# Altium PCB PCB2.PcbDoc
Units mm, origin at the board's own origin, x right, y up, seen from the top; angles counter-clockwise.
Board outline 90 x 71 mm, 2 copper layers (Top Layer, Bottom Layer); 35 components, 38 nets, 145 pads, 20 vias.
Unrouted connection lines stored in the file: 5.
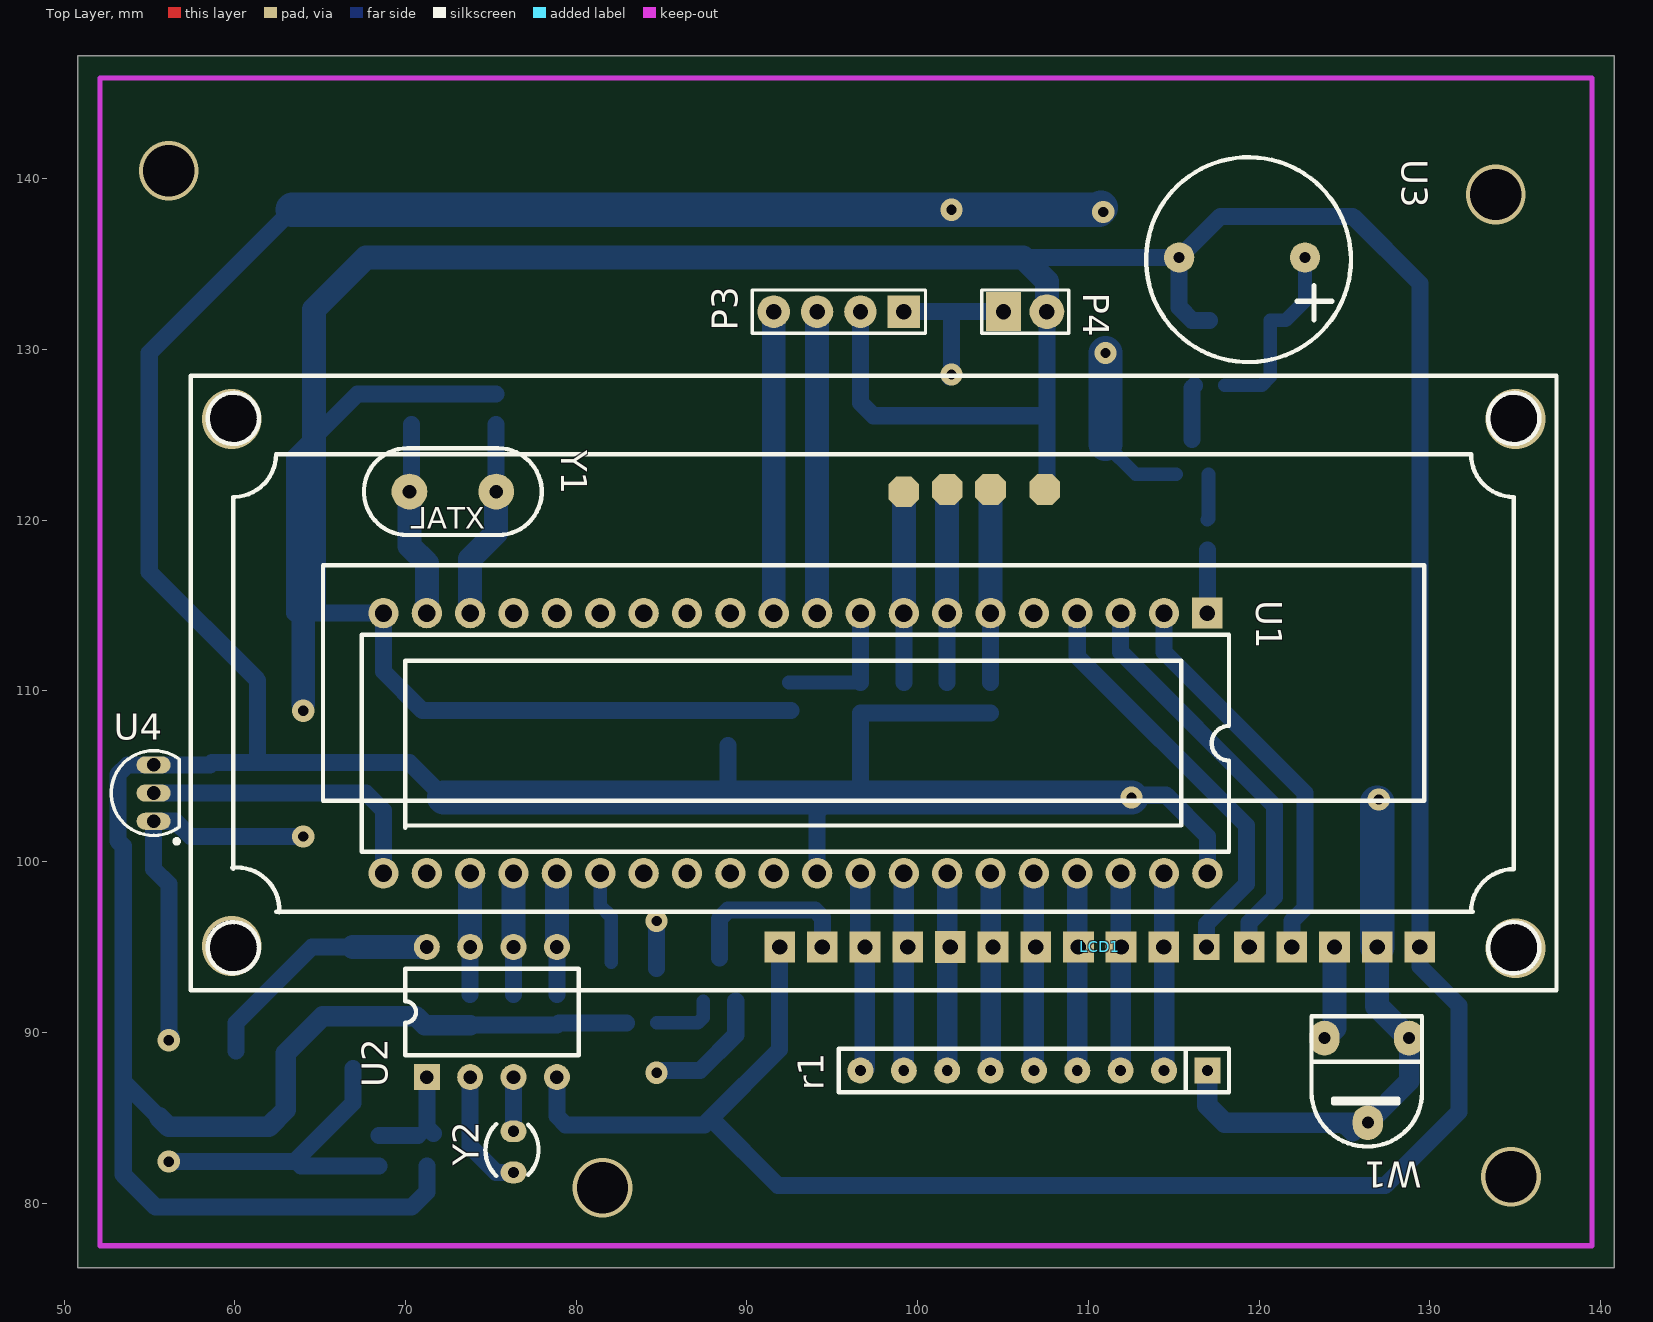
[diagram p0: Top Layer view]
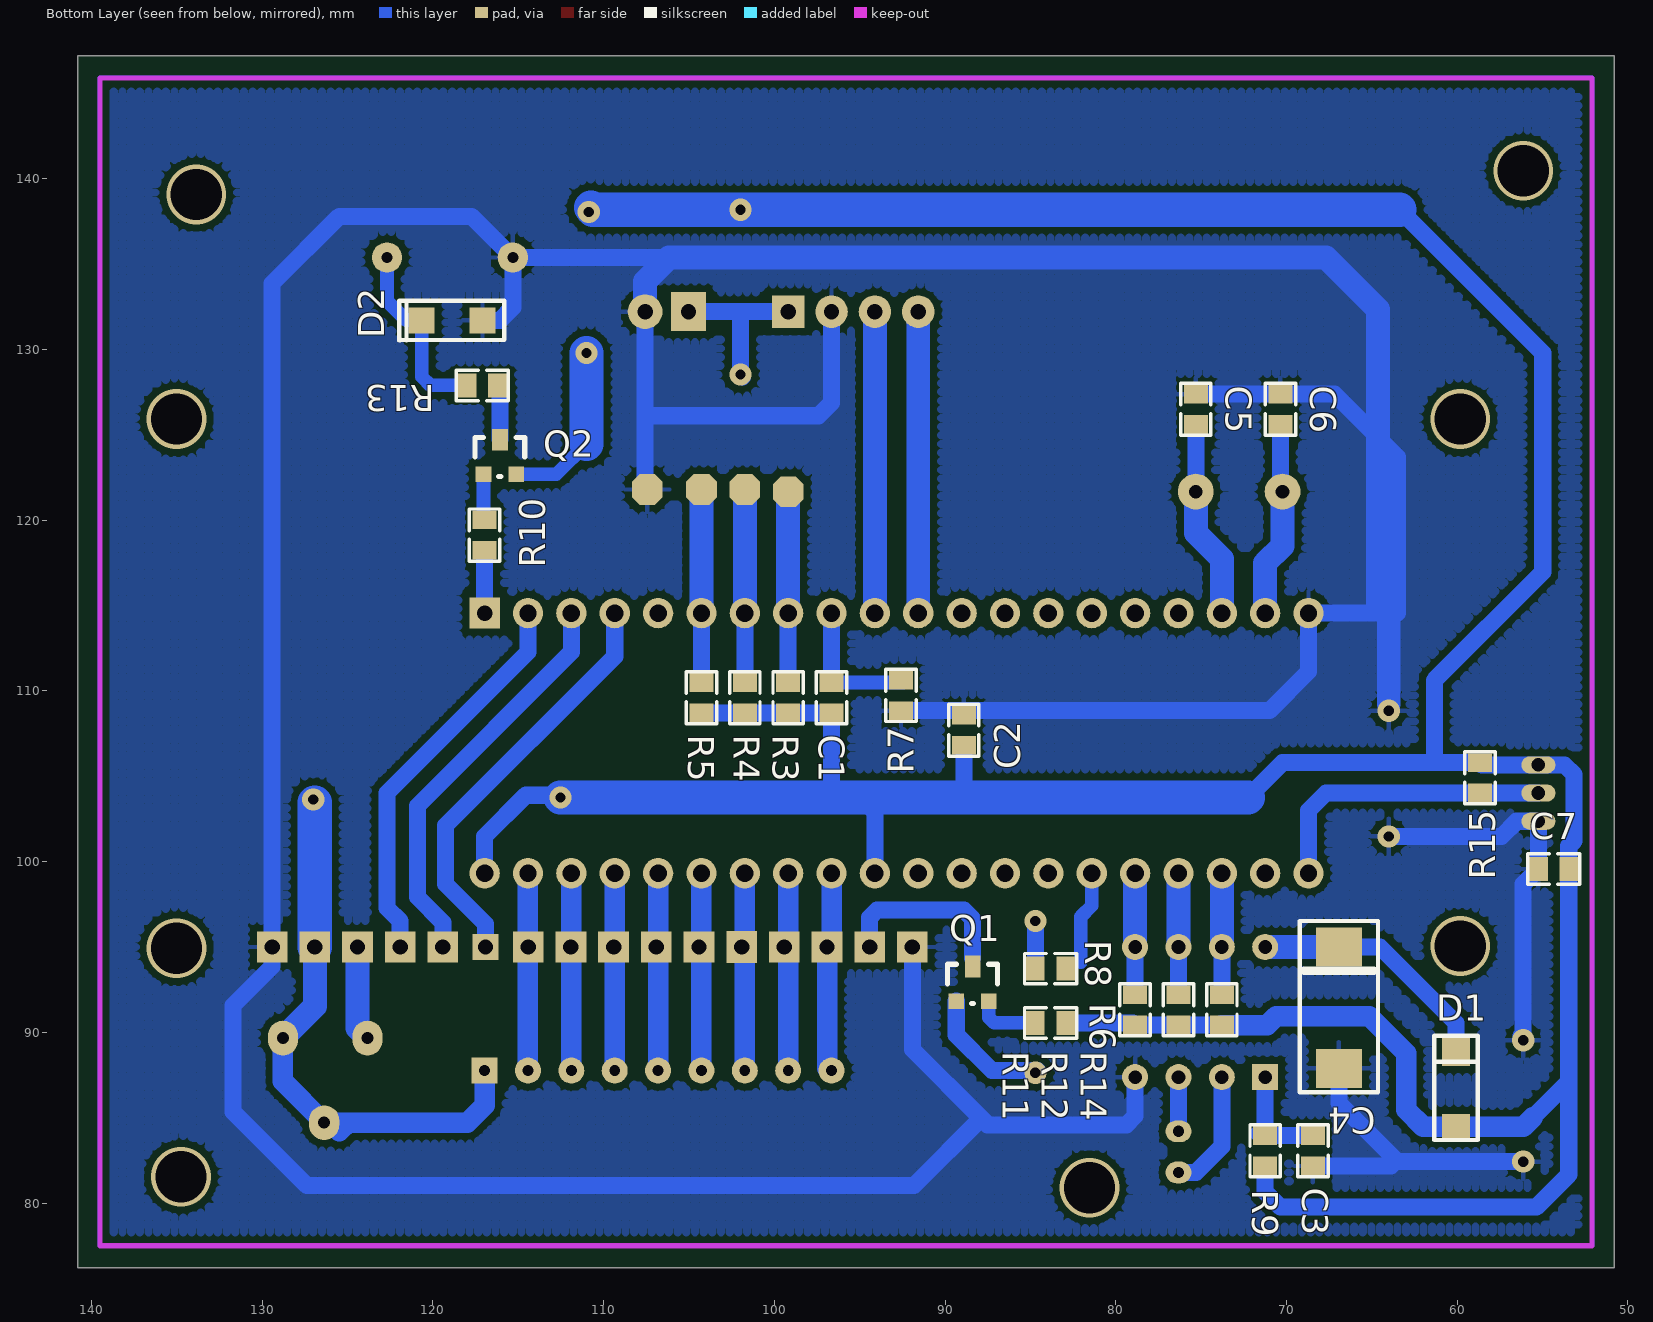
[diagram p1: Bottom Layer view, seen from below]

## Layer stack, top to bottom
Top Layer: signal copper 0.0356
Dielectric: dielectric 0.32, FR-4, Dk 4.8
Bottom Layer: signal copper 0.0356

## Board outline
50.8,76.2 140.8,76.2 140.8,147.2 50.8,147.2

## Design rules (kind name [scope] priority, off if disabled: settings)
Clearance [All] p1: gap=0.4
PolygonConnect [All] p1: connectstyle=Relief reliefconductorwidth=0.254 reliefentries=4 polygonreliefangle="90 Angle"
RoutingVias [All] p1: holewidth=0.7 width=1.2 viastyle="Through Hole" minholewidth=0.711 minwidth=1.27 maxholewidth=0.711 maxwidth=1.27
SilkscreenOverComponentPads [All] p1: minsilkscreentomaskgap=0.254
SolderMaskExpansion [All] p1: expansion=0.102
Width [All] p1: maxlimit=3 minlimit=0.5 preferedwidth=1
27 further rules are at their usual default settings.

## Components (designator, comment, footprint, x,y, rotation, side; value= is the part's Value field where it differs from the comment)
C1 "104" 0805C 96.647,110.49 r270 bottom
C2 "104" 0805C 88.9,106.807 r90 bottom
C3 "104" 0805C 68.453,83.947 r270 bottom
C4 "CE" 2817C+ 66.929,94.996 r270 bottom
C5 "20" 0805C 75.311,127.381 r270 bottom
C6 "20" 0805C 70.358,127.381 r270 bottom
C7 "104" 0805C 55.245,99.568 r180 bottom
D1 "DIODE" SS14-4007 60.071,84.455 r90 bottom
D2 "D IN4148" 4148YZ 117.094,131.699 r0 bottom
LCD1 "1602" LCD1602 129.413,94.996 r180 top
P3 "CON4" SIP4 99.187,132.207 r180 top
P4 "CON2" SIP2 105.029,132.207 r0 top
Q1 "2SC8550" SOT23 88.392,92.837 r180 bottom
Q2 "2SC8550" SOT23 116.078,123.698 r180 bottom
r1 "10K" RPZ9 116.967,87.757 r180 top
R3 "10K" 0805R 99.187,110.49 r270 bottom
R4 "10K" 0805R 101.727,110.49 r270 bottom
R5 "10K" 0805R 104.267,110.49 r270 bottom
R6 "1k" 0805R 82.931,90.551 r0 bottom
R7 "4.7K" 0805R 92.583,108.839 r90 bottom
R8 "1k" 0805R 82.931,93.726 r0 bottom
R9 "100" 0805R 71.247,83.947 r270 bottom
R10 "1K" 0805R 116.967,118.237 r90 bottom
R11 "RES" 0805R 78.867,92.202 r270 bottom
R12 "RES" 0805R 76.327,92.202 r270 bottom
R13 "100" 0805R 116.205,127.889 r0 bottom
R14 "RES" 0805R 73.787,92.202 r270 bottom
R15 "4.7K" 0805R 58.674,104.013 r90 bottom
U1 "STC89C52" DIP40 116.967,114.554 r270 top
U2 "DS1302" DIP8 71.247,87.376 r90 top
U3 "buzzer" BUZZER 122.682,135.382 r0 top
U4 "18B20" 18B20 55.245,102.362 r0 top
W1 "200" RV 128.778,89.662 r180 top
Y1 "12M" XTAL 70.231,121.666 r0 top
Y2 "XTAL" XTAL1-X 76.327,84.201 r90 top

## Footprints (in the part's own frame and the unit in brackets; to place one, negate y for a bottom-side part, rotate by r counter-clockwise, add the part's x,y. Pads: shape width x height; smd on the part's side, far side on the other; paste and mask are expansions set on the pad)
18B20 [mm]
  oval 2x1 hole 0.8: 1(0,0) 2(0,1.651) 3(0,3.302)
  silkscreen extent -2.48,-1.3 1.5,4.14, body extent -2.26,-0.82 2.01,4.38, height 10.08
0805C [mm]
  rect 1.1x1.4 smd: 1(0,0) 2(1.778,0)
  silkscreen extent -0.64,-0.89 2.41,0.89, body extent -0.11,-0.62 1.89,0.63, height 0.78
0805R [mm]
  rect 1.1x1.4 smd: 1(0,0) 2(1.778,0)
  silkscreen extent -0.64,-0.89 2.41,0.89, body extent -0.11,-0.63 1.89,0.63, height 0.55
2817C+ [mil]
  rect 90x106.3 smd: 1(0,0) 2(280,0)
  silkscreen extent -60,-90 335,90, body extent 1,-84 289,85, height 111
4148YZ [mil]
  rect 60x60 smd: 1(0,0) 2(140,0)
  silkscreen extent -50,-45 192,46, body extent 6,-30 144,30, height 80
BUZZER [mil]
  round 70 hole 25.59: 1(0,0) 2(-290,0)
  silkscreen extent -366,-241 106,231, body extent -415,-241 193,231, height 390
DIP8 [mil]
  rect 60x60 hole 31.5: 1(0,0)
  round 60 hole 31.5: 2(0,-100) 3(0,-200) 4(0,-300) 5(300,-300) 6(300,-200) 7(300,-100) 8(300,0)
  silkscreen extent 50,-350 250,50, body extent 0,-365 306,61, height 227
DIP40 [mil]
  rect 70.87x70.87 hole 35.43: 1(0,0)
  round 70 hole 40: 2(0,-100) 3(0,-200) 4(0,-300) 5(0,-400) 6(0,-500) 7(0,-600) 8(0,-700) 9(0,-800) 10(0,-900) 11(0,-1000) 12(0,-1100) 13(0,-1200) 14(0,-1300) 15(0,-1400) 16(0,-1500) 17(0,-1600) 18(0,-1700) 19(0,-1800) 20(0,-1900) 21(600,-1900) 22(600,-1800) 23(600,-1700) 24(600,-1600) 25(600,-1500) 26(600,-1400) 27(600,-1300) 28(600,-1200) 29(600,-1100) 30(600,-1000) 31(600,-900) 32(600,-800) 33(600,-700) 34(600,-600) 35(600,-500) 36(600,-400) 37(600,-300) 38(600,-200) 39(600,-100) 40(600,0)
  silkscreen extent 50,-1950 550,50, body extent 6,-1982 615,82, height 244
LCD1602 [mm] "LCD"
  rect 1.8x1.8 hole 0.9: 1(0,0) 2(2.5,0) 3(5,0) 4(7.5,0) 5(10,0) 7(15,0) 8(17.5,0) 9(20,0) 10(22.5,0) 11(25,0) 13(30,0) 14(32.5,0) 15(35,0) 16(37.5,0)
  rect 1.524x1.524 hole 0.9: 6(12.5,0)
  rect 1.8x1.9 hole 0.9: 12(27.5,0)
  silkscreen extent -8,-33.46 72,2.54
RPZ9 [mil]
  rect 60x60 hole 25: 1(0,0)
  round 60 hole 25: 2(100,0) 3(200,0) 4(300,0) 5(400,0) 6(500,0) 7(600,0) 8(700,0) 9(800,0)
  silkscreen extent -50,-50 850,50, body extent -43,-29 843,20, height 249
RV [mil]
  oval 70x80 hole 28: 1(0,0) 3(195,0) W(95,195)
  silkscreen extent -30,-50 225,250, body extent -31,-53 225,225, height 329
SIP2 [mil] "Connector; Header; 2 Position"
  rect 80x90 hole 35.43: 1(0,0)
  round 80 hole 35.43: 2(100,0)
  silkscreen extent -50,-50 150,50, body extent -50,-50 150,50, height 298
SIP4 [mm] "Connector; Header; 4 Position"
  rect 1.905x1.905 hole 0.9: 1(0,0)
  round 1.905 hole 0.9: 2(2.54,0) 3(5.08,0) 4(7.62,0)
  silkscreen extent -1.27,-1.27 8.89,1.27, body extent -1.27,-1.27 8.89,1.27, height 7.58
SOT23 [mil]
  rect 36x36 smd: B(-37.5,-40) E(37.5,-40)
  rect 36x50 smd: C(0.5,40)
  silkscreen extent -58,-45 58,45, body extent -55,-51 59,59, height 47
SS14-4007 [mil] "Chip Inductor, Body 2.0x1.2mm, IPC High Density"
  rect 60x65 smd: 1(0,0)
  rect 70x65 smd: 2(175,0)
  silkscreen extent -30,-50 210,50, body extent -3,-54 181,50, height 89
XTAL [mm]
  round 2.1 hole 0.8: 1(0,0) 2(5.08,0)
  silkscreen extent -2.66,-2.54 7.74,2.54, body extent -3.05,-2.35 8.13,2.35, height 4.19
XTAL1-X [mil]
  oval 50x60 hole 25.59: 1(0,0) 2(-95,0)
  silkscreen extent -103,-58 17,65, body extent -66,-44 -20,2, height 160

## Part data
C1 C2 C3 C5 C6 C7: library part CAP
r1: library part RPZ9
R3 R4 R5 R6 R7 R8 R9 R10 R13 R15: library part RES
W1: library part RV, "Variable Resistor"
Y1: library part XTAL, "Crystal Oscillator"
Y2: "Crystal Oscillator"

## Free pads (board coordinates)
  oct 1.8x1.8 all layers, no hole: 3(99.187,121.666) 4(101.727,121.793) 5(104.267,121.793) 6(107.442,121.793)

## Via types
v1: diameter 1.3, hole 0.6, Top Layer to Bottom Layer, 12 vias
v2: diameter 3.5, hole 3, Top Layer to Bottom Layer, 8 vias

## Nets (pads, with @x,y where several pads share a name; then routed paths per layer and width w, separated by ;. In a path a pad name is that pad's centre, name@x,y a point inside that pad or via, vN(x,y) a via of type N, cw(c..) or ccw(c..) an arc to the next point about the centre after c; other vN are vias at no path point)
18B20: R15.1 U1.21 U4.2 | length 17.6
  Bottom Layer w1: U4.2 R15.1 67.691,104.013 68.707,102.997 U1.21
E: LCD1.6 U1.4 | length 24.6
  Bottom Layer w1: U1.4 109.347,112.014 119.253,102.108 119.253,98.679 116.913,96.339 LCD1.6
GND: C2.2 C3.2 C4.2 C5.1 C6.1 C7.1 D2.1 LCD1.1 LCD1.16 P3.2 P4.2 pad.6 R7.1 U1.20 U2.4 U3.2 U4.1 | length 345.2
  Bottom Layer w1: v1(56.134,82.423) 63.5,82.423 63.563,82.486 ; v1@56.261,89.789 56.134,89.916 56.134,98.679 C7.1 U4.1 56.515,102.362 57.404,101.473 v1(64.008,101.473) ; C4.2 66.929,85.852 63.563,82.486 ; C3.2 63.881,82.169 63.563,82.486 ; C5.1 C6.1 67.183,127.381 64.643,124.841 63.5,123.698 63.5,114.554 64.008,114.554 U1.20 68.707,111.125 70.993,108.839 R7.1 ; U2.4 78.867,85.09 79.375,84.582 87.503,84.582 87.884,84.963 ; LCD1.16 91.913,88.992 87.884,84.963 ; P3.2 96.647,126.873 97.409,126.111 107.569,126.111 ; 106.172,135.382 U3.2 ; pad.6 107.569,121.92 107.569,126.111 ; P4.2 107.569,126.111 ; D2.1 116.078,131.699 115.316,132.461 U3.2 ; 87.884,84.963 91.821,81.026 127.381,81.026 131.699,85.344 131.699,91.567 129.413,93.853 LCD1.1 129.413,133.858 125.476,137.795 117.729,137.795 U3.2
  Bottom Layer w1.4: v1@64.008,109.22 64.008,114.554 64.643,115.189 64.643,124.841 64.643,132.334 67.691,135.382 106.172,135.382 107.569,133.985 P4.2
  other v1: 56.134,89.535 64.008,108.839
LED: R8.1 U1.26 | length 5.5
  Bottom Layer w0.8: U1.26 81.407,97.409 82.042,96.774 82.042,94.107
NetC1_1: C1.1 R7.2 U1.9 | length 8.3
  Bottom Layer w0.8: R7.2@92.456,110.49 C1.1
  Bottom Layer w1: C1.1 U1.9
NetC3_1: C3.1 R9.1 U2.1 | length 5.7
  Bottom Layer w1: C3.1 R9.1@70.739,83.947 ; U2.1 71.247,84.455 R9.1@71.628,84.074
NetC4_1: C4.1 D1.2 U2.8 | length 14.7
  Bottom Layer w1: D1.2 60.071,90.551 61.595,92.075 64.516,94.996 C4.1
  Bottom Layer w1.4: C4.1 U2.8
NetC5_2: C5.2 U1.18 Y1.2 | length 11.7
  Bottom Layer w1: Y1.2 C5.2
  Bottom Layer w1.4: U1.18 73.787,117.729 75.311,119.253 Y1.2
NetC6_2: C6.2 U1.19 Y1.1 | length 11.5
  Bottom Layer w1: Y1.1 70.358,121.793 C6.2
  Bottom Layer w1.4: Y1.1 70.231,118.491 71.247,117.475 U1.19
NetD2_2: D2.2 R13.2 U3.1 | length 11.2
  Bottom Layer w0.8: R13.2 120.142,127.889 120.65,128.397 D2.2 121.539,131.699 122.682,132.842 U3.1
NetLCD1_3: LCD1.3 W1.3 | length 5.6
  Bottom Layer w1.4: W1.3 124.413,90.25 LCD1.3
NetLCD1_7: LCD1.7 r1.2 U1.39 | length 11.6
  Bottom Layer w1.2: U1.39 114.427,87.884 r1.2@114.554,87.757
NetLCD1_8: LCD1.8 r1.3 U1.38 | length 11.6
  Bottom Layer w1.2: U1.38 111.887,87.884 r1.3@112.014,87.757
NetLCD1_9: LCD1.9 r1.4 U1.37 | length 11.6
  Bottom Layer w1.2: U1.37 109.347,87.884 r1.4@109.474,87.757
NetLCD1_10: LCD1.10 r1.5 U1.36 | length 11.6
  Bottom Layer w1.2: U1.36 106.807,87.884 r1.5@106.934,87.757
NetLCD1_11: LCD1.11 r1.6 U1.35 | length 11.6
  Bottom Layer w1.2: U1.35 104.267,87.884 r1.6@104.394,87.757
NetLCD1_12: LCD1.12 r1.7 U1.34 | length 11.6
  Bottom Layer w1.2: U1.34 101.727,87.884 r1.7@101.854,87.757
NetLCD1_13: LCD1.13 r1.8 U1.33 | length 11.6
  Bottom Layer w1.2: U1.33 99.187,87.884 r1.8@99.314,87.757
NetLCD1_14: LCD1.14 r1.9 U1.32 | length 11.7
  Bottom Layer w1.2: U1.32 96.647,95.194 96.904,94.937 96.904,87.887 r1.9@96.774,87.757
NetLCD1_15: LCD1.15 Q1.C | length 10.4
  Bottom Layer w1: Q1.C@88.379,94.361 88.379,96.634 88.9,97.155 93.98,97.155 94.413,96.722 LCD1.15
NetP3_3: P3.3 U1.10 | length 17.7
  Bottom Layer w1.4: U1.10 P3.3
NetP3_4: P3.4 U1.11 | length 17.7
  Bottom Layer w1.4: U1.11 P3.4
NetQ1_B: Q1.B R8.2 | length 10.1
  Bottom Layer w1: v1@84.582,87.757 87.249,87.757 89.344,89.852 Q1.B ; R8.2 v1@84.709,96.266
  other v1: 84.709,87.63 84.709,96.52
NetQ1_E: Q1.E R6.2 | length 3.8
  Bottom Layer w0.8: R6.2 87.122,90.551 87.439,90.868 Q1.E
NetQ2_B: Q2.B R10.2 | length 2.7
  Bottom Layer w0.8: R10.2 117.03,120.078 Q2.B
NetQ2_C: Q2.C R13.1 | length 3.2
  Bottom Layer w1: Q2.C 116.065,127.749 R13.1
NetU2_2: U2.2 Y2.2 | length 7.2
  Bottom Layer w1: U2.2 73.787,83.312 75.311,81.788 Y2.2
NetU2_3: U2.3 Y2.1 | length 3.2
  Bottom Layer w1: Y2.1 U2.3
R/W: LCD1.5 U1.3 | length 23.9
  Bottom Layer w1: U1.3 111.887,112.268 120.904,103.251 120.904,97.917 119.413,96.426 LCD1.5
RS: LCD1.4 U1.2 | length 23.3
  Bottom Layer w1: U1.2 114.427,112.268 122.682,104.013 122.682,97.282 121.913,96.513 LCD1.4
S0: pad.5 R5.1 U1.6 | length 11.3
  Bottom Layer w1: R5.1 U1.6
  Bottom Layer w1.4: U1.6 pad.5
S1: pad.4 R4.1 U1.7 | length 11.3
  Bottom Layer w1: R4.1 U1.7
  Bottom Layer w1.4: U1.7 pad.4
S2: pad.3 R3.1 U1.8 | length 11.2
  Bottom Layer w1: R3.1 U1.8
  Bottom Layer w1.4: U1.8 pad.3
S1320: R14.1 U1.23 U2.7 | length 7.1
  Bottom Layer w1: R14.1 U2.7
  Bottom Layer w1.4: U2.7 U1.23
SCLK: R11.1 U1.25 U2.5 | length 7.1
  Bottom Layer w1: R11.1 U2.5
  Bottom Layer w1.4: U2.5 U1.25
SIO: R12.1 U1.24 U2.6 | length 7.1
  Bottom Layer w1: R12.1 U2.6
  Bottom Layer w1.4: U2.6 U1.24
SP: R10.1 U1.1 | length 3.7
  Bottom Layer w1: U1.1 R10.1
VCC: C1.2 C2.1 C7.2 D1.1 LCD1.2 P3.1 P4.1 Q2.E r1.1 R3.2 R4.2 R5.2 R6.1 R9.2 R11.2 R12.2 R14.2 R15.2 U1.31 U1.40 U4.3 W1.1 W1.W | length 308.9
  Bottom Layer w0.8: 110.998,124.46 112.776,122.682 Q2.E
  Bottom Layer w1: 55.562,85.026 53.467,87.122 ; 63.373,138.176 54.991,129.794 54.991,116.967 61.341,110.617 61.341,105.791 ; R9.2 71.247,80.645 70.358,79.756 55.372,79.756 53.467,81.661 53.467,87.122 ; 72.263,103.759 70.231,105.791 61.341,105.791 ; R14.2 R12.2 R11.2 78.994,90.551 R6.1 ; C2.1 88.9,103.886 89.027,103.759 ; U1.31 94.107,102.87 94.996,103.759 96.774,103.759 ; 96.647,103.886 C1.2 R3.2 R4.2 R5.2 ; P3.1 101.981,132.207 ; v1@101.854,128.397 v1(101.981,128.524) 101.981,132.207 ; P4.1 101.981,132.207 ; v1(112.522,103.759) 112.649,103.886 114.554,103.886 116.967,101.473 U1.40 ; v1@126.746,103.632 v1@126.913,103.465 ; 53.467,87.122 C7.2 53.467,100.902 53.15,101.219 53.15,105.093 53.721,105.664 U4.3 58.547,105.664 R15.2 61.341,105.791
  Bottom Layer w1.2: 55.562,85.026 56.134,84.455 D1.1 61.976,84.455 62.992,85.471 62.992,88.773 65.151,90.932 70.612,90.932 71.12,90.424 R14.2 ; r1.1 116.967,85.725 117.983,84.709 124.968,84.709 ; 125.476,84.201 124.968,84.709 ; W1.1 128.778,87.122 W1.W 124.968,84.709
  Bottom Layer w1.4: LCD1.2 126.913,91.527 W1.1
  Bottom Layer w2: 63.373,138.176 v1(101.981,138.176) 110.617,138.176 v1@110.744,138.303 ; 72.263,103.759 89.027,103.759 94.996,103.759 v1(112.522,103.759) ; 110.998,124.46 v1(110.998,129.794) ; LCD1.2 v1@126.913,103.465
  other v1: 127,103.632 110.871,138.049
pads on no net: U1.5 U1.12 U1.13 U1.14 U1.15 U1.16 U1.17 U1.22 U1.27 U1.28 U1.29 U1.30
copper on no net: | length 554.8
  Bottom Layer w0.254: 52.1,77.5 52.1,145.9 ; 52.1,77.5 139.5,77.5 ; 52.1,77.5 139.5,77.5 ; 52.1,145.9 139.5,145.9 ; 52.1,145.9 139.5,145.9 ; 139.5,77.5 139.5,145.9 ; 139.5,77.5 139.5,145.9
  other v2: 81.534,80.899 134.747,81.534 135.01,94.928 59.826,95.055 59.826,125.916 135.01,125.916 133.858,139.065 56.134,140.462

## Polygon pours and split planes (outlines as drawn)
GND on Bottom Layer "Bottom Layer-No Net" (hatched 90Degree grid 0.508 track 0.49, remove dead copper, pour order 2): 50.673,147.193 50.8,147.066 140.843,147.066 140.843,76.327 140.335,75.819 139.827,76.327 50.292,76.327 50.292,146.685 50.8,147.193

## Keep-outs
Keep-Out Layer:
  lines w0.3: 52.1,77.5 139.5,77.5 139.5,145.9 52.1,145.9 52.1,77.5

## Silkscreen, mask and mechanical layers (free items; w line width, h text height)
Drill Drawing:
  text ".LEGEND" at 145.88,81.28 h1.52
  text "Drill Drawing." at 150.622,70.612 h1.52

## Dimensions
52.1,77.5 to 139.5,77.5 on Mechanical 1
52.1,77.5 to 52.1,145.9 on Mechanical 1

## Text inside footprints (layer, text, board x,y; h text height)
Y1: Top Overlay "XTAL" at 74.676,119.507 h1.27